# EAGLE board I2C Module v8 wo PS (EAGLE 6.1)
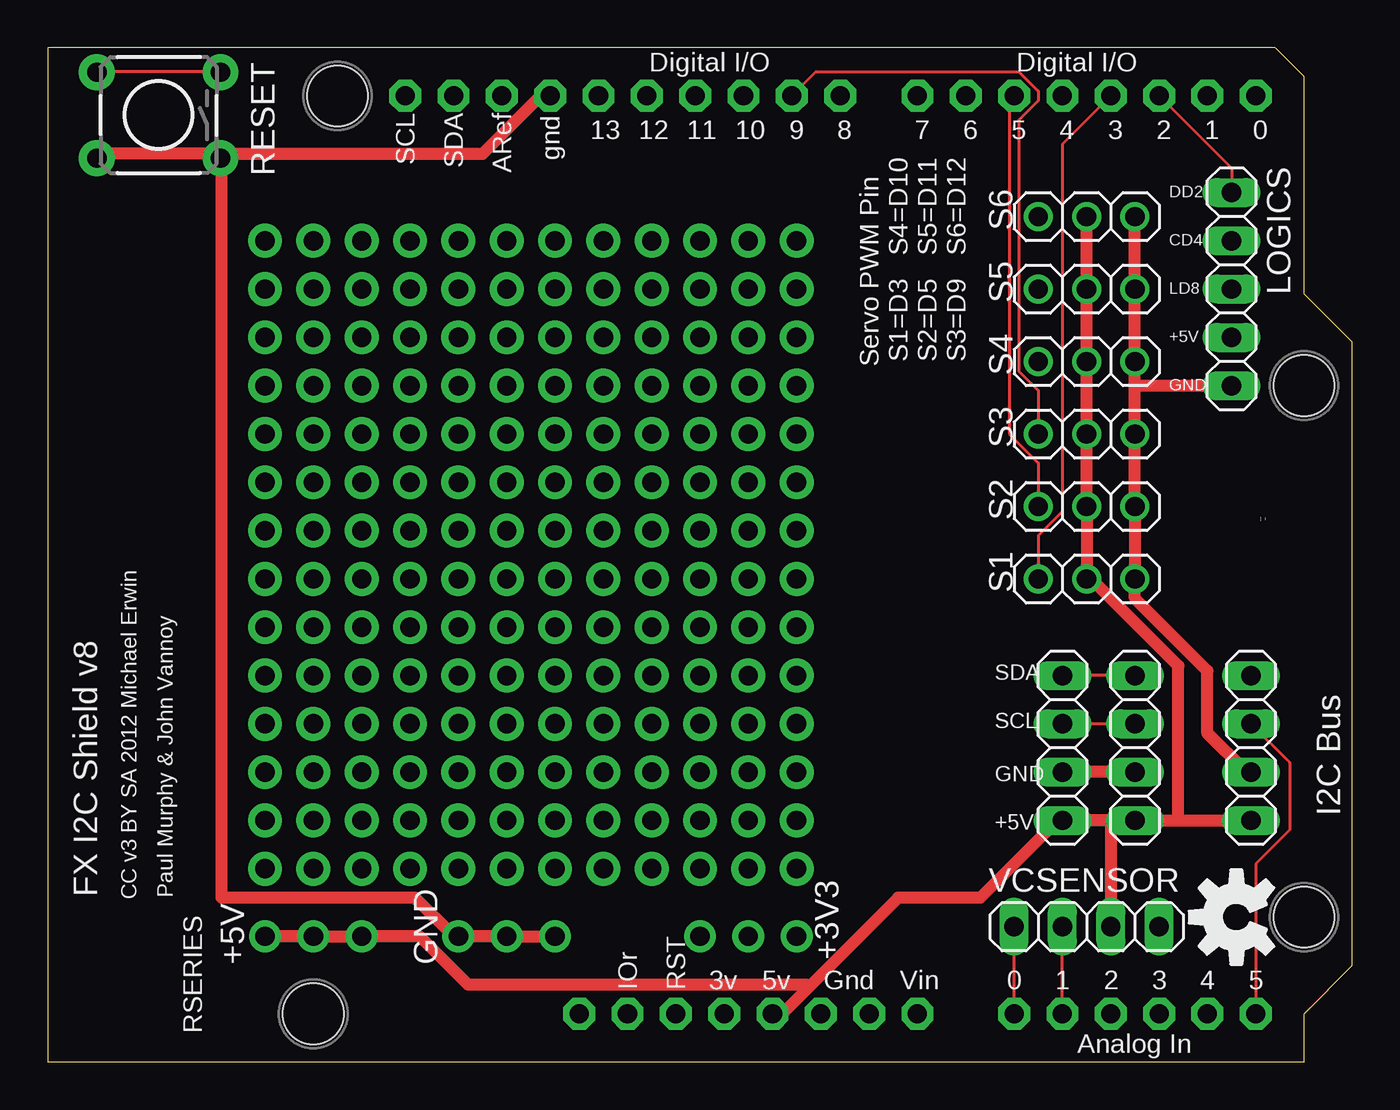
[diagram p0: board, top side]
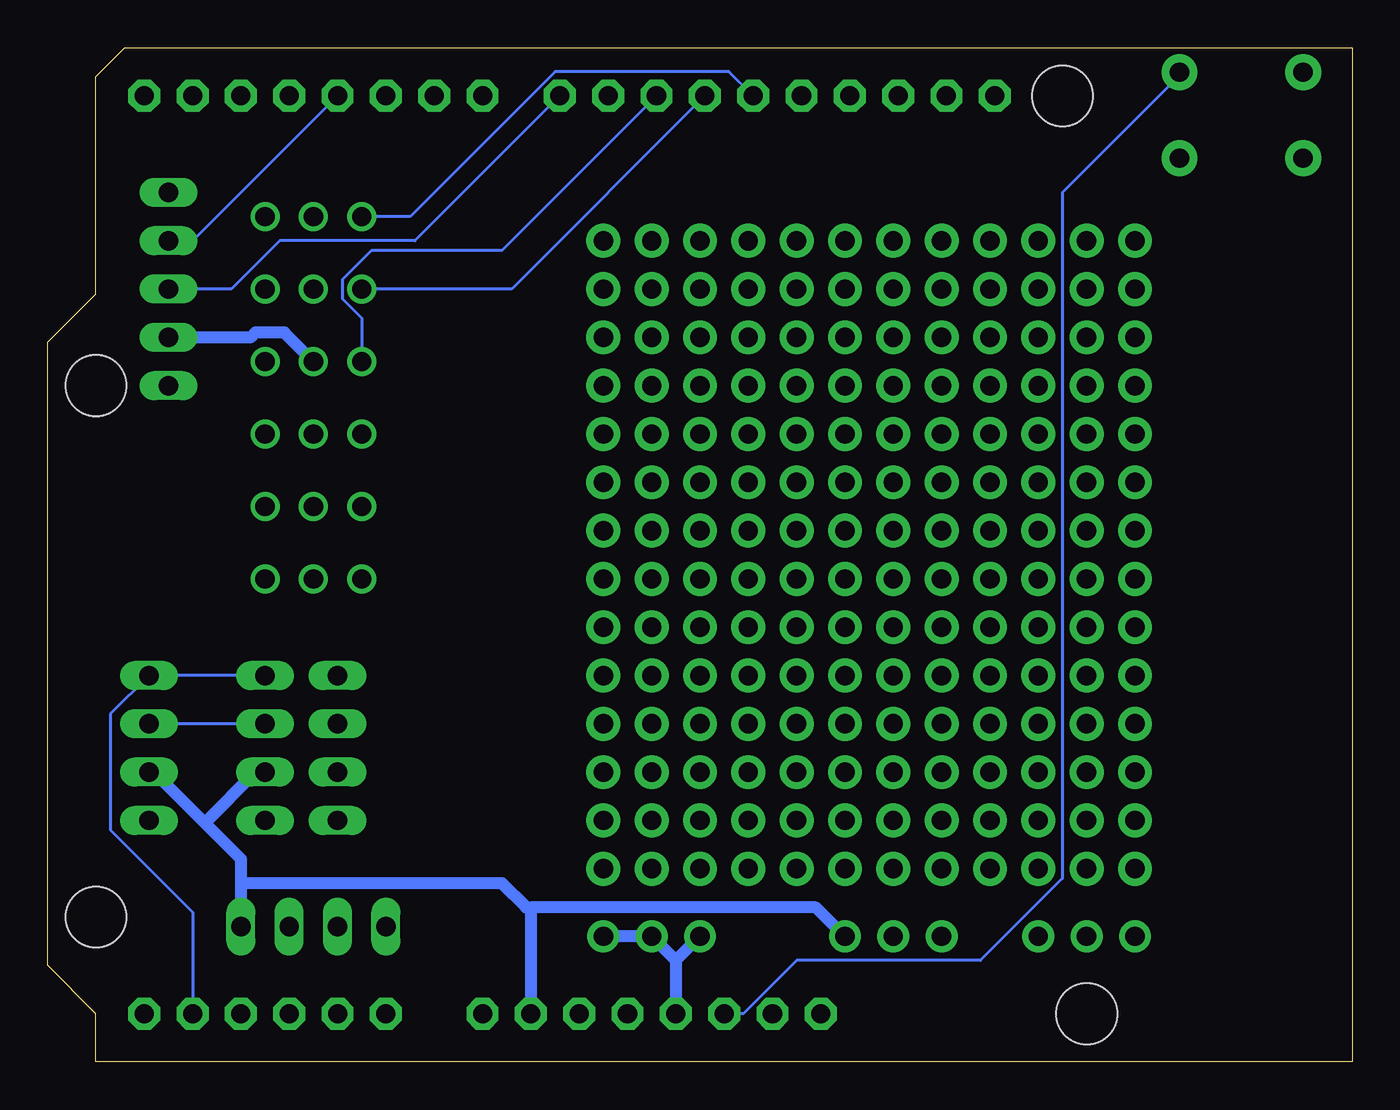
[diagram p1: board, bottom side, seen from below]

Size 68.58 x 53.34 mm. Coordinates in mm from the lower left corner, seen from the top.
Copper layers (1*16): Top 0.0356mm / dielectric 1.5011mm / Bottom 0.0356mm
Design rules: minimum track width 6mil, minimum drill 13mil, track to track 6mil, track to pad 6mil, pad to pad 6mil, via to via 6mil, smd to smd 6mil, copper to edge 15mil, drill to drill 6mil, minimum pad ring 7mil, minimum via ring 7mil, stop-mask expansion 4mil, vias tented up to drill 0mil, thermal gap 10mil
Net classes: 1 POWER: width 0.635 mm, clearance 0.254 mm
Holes 3.2 mm at 15.24,50.8 66.04,35.56 66.04,7.62 13.97,2.54

## Footprints (pad centres in the part's own frame; a part is rotated, then mirrored left to right if it is on the bottom)
1X03-CLEANBIG = drill 1.016 pad 1.676: 1 -2.54,0; 2 0,0; 3 2.54,0
1X04 = drill 1.016 long: 1 -3.81,0; 2 -1.27,0; 3 1.27,0; 4 3.81,0
1X12-CB = drill 1.016 pad 1.778: 1 -13.97,0; 2 -11.43,0; 3 -8.89,0; 4 -6.35,0; 5 -3.81,0; 6 -1.27,0; 7 1.27,0; 8 3.81,0; 9 6.35,0; 10 8.89,0; 11 11.43,0; 12 13.97,0
1X05 = drill 1.016 long: 1 -5.08,0; 2 -2.54,0; 3 0,0; 4 2.54,0; 5 5.08,0
TACTILE-PTH = drill 1.016 pad 1.88: 1 -3.251,2.261; 2 3.251,2.261; 3 -3.251,-2.261; 4 3.251,-2.261
1X03 = drill 1.016: 1 -2.54,0; 2 0,0; 3 2.54,0
ARDUINOR3 = drill 1 pad 1.676 octagon: 3V 35.56,2.54; 5V 38.1,2.54; A0 50.8,2.54; A1 53.34,2.54; A2 55.88,2.54; A3 58.42,2.54; A4 60.96,2.54; A5 63.5,2.54; AREF 23.876,50.8; D0 63.5,50.8; D1 60.96,50.8; D2 58.42,50.8; D3 55.88,50.8; D4 53.34,50.8; D5 50.8,50.8; D6 48.26,50.8; D7 45.72,50.8; D8 41.656,50.8; D9 39.116,50.8; D10 36.576,50.8; D11 34.036,50.8; D12 31.496,50.8; D13 28.956,50.8; GND 26.416,50.8; GND1 43.18,2.54; GND2 40.64,2.54; IOREF 30.48,2.54; RESERVED 27.94,2.54; RESET 33.02,2.54; SCL 18.796,50.8; SDA 21.336,50.8; VIN 45.72,2.54

## Placement (x,y rotation side)
+3V3  [1X03-CLEANBIG]  36.83,6.6 0 top
+5V  [1X03-CLEANBIG]  13.97,6.6 0 top
GND  [1X03-CLEANBIG]  24.13,6.6 0 top
I2C3  [1X04]  63.25,16.51 270 top
JP1  [1X04]  53.34,16.51 270 top
JP2  [1X04]  57.15,16.51 270 top
JP3  [1X12-CB]  25.4,10.16 0 top
JP4  [1X12-CB]  25.4,12.7 0 top
JP5  [1X12-CB]  25.4,15.24 0 top
JP6  [1X12-CB]  25.4,17.78 0 top
JP7  [1X12-CB]  25.4,20.32 0 top
JP8  [1X12-CB]  25.4,22.86 0 top
JP9  [1X12-CB]  25.4,25.4 0 top
JP10  [1X12-CB]  25.4,27.94 0 top
JP11  [1X12-CB]  25.4,30.48 0 top
JP12  [1X12-CB]  25.4,33.02 0 top
JP13  [1X12-CB]  25.4,35.56 0 top
JP14  [1X12-CB]  25.4,38.1 0 top
JP15  [1X12-CB]  25.4,40.64 0 top
JP16  [1X12-CB]  25.4,43.18 0 top
LOGICS  [1X05]  62.23,40.64 270 top
RESET  [TACTILE-PTH]  5.84,49.78 180 top
S1  [1X03]  54.61,25.4 0 top
S2  [1X03]  54.61,29.21 0 top
S3  [1X03]  54.61,33.02 0 top
S4  [1X03]  54.61,36.83 0 top
S5  [1X03]  54.61,40.64 0 top
S6  [1X03]  54.61,44.45 0 top
U1  ARDUINOR3-DIMENSION  [ARDUINOR3]  0,0 0 top
U$1  OSHW-LOGOM  [OSHW-LOGO-M]  62.48,7.62 90 top
VCSENSOR  [1X04]  54.61,7.11 0 top

## Library data of the parts
+3V3 +5V GND JP3-JP16 S1-S6 U1 = adafruit
I2C3 JP1 JP2 LOGICS VCSENSOR = pinhead
RESET = SparkFun-Electromechanical
U$1 = SparkFun-Aesthetics

## Nets
+3V3 [POWER]: +3V3.1 +3V3.2 +3V3.3 U1.3V
+5V [POWER]: +5V.1 +5V.2 +5V.3 I2C3.4 JP1.4 JP2.4 LOGICS.4 S1.2 S2.2 S3.2 S4.2 S5.2 S6.2 U1.5V VCSENSOR.3
GND [POWER]: GND.1 GND.2 GND.3 I2C3.3 JP1.3 JP2.3 LOGICS.5 RESET.1 RESET.2 S1.3 S2.3 S3.3 S4.3 S5.3 S6.3 U1.GND U1.GND1 VCSENSOR.4
GND2: U1.GND2
N$1: U1.A0 VCSENSOR.1
N$2: LOGICS.3 U1.D8
N$3: U1.A1 VCSENSOR.2
N$4: S1.1 U1.D3
N$5: S2.1 U1.D5
N$6: S3.1 U1.D9
N$7: S4.1 U1.D10
N$8: S5.1 U1.D11
N$9: S6.1 U1.D12
N$10: LOGICS.2 U1.D4
N$11: LOGICS.1 U1.D2
N$12: RESET.3 RESET.4 U1.RESET
N$15: I2C3.2 JP1.2 JP2.2 U1.A5
N$16: I2C3.1 JP1.1 JP2.1 U1.A4
VIN: U1.VIN

## Tracks (layer width: path | path; a pad name or v marks a point on that pad's centre or on a via)
+3V3
  Bottom 0.635: 35.56,5.33 U1.3V | +3V3.1 35.56,5.33 | 35.56,5.33 +3V3.2 +3V3.3
+5V
  Top 0.635: +5V.1 +5V.2 +5V.3 19.56,6.6 22.1,4.06 39.88,4.06 40.01,3.94 | S6.2 S5.2 S4.2 S3.2 S2.2 S1.2 54.86,25.4 59.44,20.83 59.44,12.7 | JP2.4 JP1.4 53.09,12.7 49.02,8.64 44.7,8.64 40.01,3.94 | JP2.4 59.44,12.7 | 59.44,12.7 I2C3.4 | U1.5V 38.61,2.54 40.01,3.94 | VCSENSOR.3 55.88,12.45 JP2.4
  Bottom 0.635: LOGICS.4 57.91,38.1 57.66,38.35 56.13,38.35 S4.2
GND
  Top 0.635: 57.15,35.56 S3.3 S2.3 S1.3 57.15,24.38 60.96,20.57 60.96,17.27 62.99,15.24 I2C3.3 | 57.15,35.56 S4.3 S5.3 S6.3 | 57.15,35.56 LOGICS.5 | GND.3 GND.2 GND.1 21.34,6.6 19.3,8.64 9.14,8.64 9.14,47.24 RESET.1 | JP2.3 JP1.3 53.09,15.24 | U1.GND 25.91,50.8 22.86,47.75 9.14,47.75 RESET.1 | RESET.2 2.79,47.75 8.89,47.75 RESET.1
  Bottom 0.635: 43.18,8.13 U1.GND1 | 60.33,12.57 62.99,15.24 I2C3.3 | 60.33,12.57 57.66,15.24 JP2.3 | 58.42,9.4 58.42,10.67 60.33,12.57 | 58.42,9.4 VCSENSOR.4 | 43.18,8.13 28.19,8.13 GND.3 | 58.42,9.4 44.7,9.4 43.43,8.13 43.18,8.13
N$1
  Top 0.152: U1.A0 VCSENSOR.1
N$2
  Bottom 0.152: LOGICS.3 58.93,40.64 56.39,43.18 49.28,43.18 U1.D8
N$3
  Top 0.152: U1.A1 VCSENSOR.2
N$4
  Top 0.152: U1.D3 53.34,48.26 53.34,28.96 52.07,27.69 S1.1
N$5
  Top 0.152: S2.1 52.07,31.5 50.55,33.02 50.55,50.55 U1.D5
N$6
  Top 0.152: S3.1 52.07,35.31 51.05,36.32 51.05,49.53 52.07,50.55 52.07,51.05 51.05,52.07 40.39,52.07 U1.D9
N$7
  Bottom 0.152: S4.1 52.07,39.12 53.09,40.13 53.09,41.15 51.56,42.67 44.7,42.67 U1.D10
N$8
  Bottom 0.152: S5.1 44.2,40.64 U1.D11
N$9
  Bottom 0.152: S6.1 49.53,44.45 41.91,52.07 32.77,52.07 U1.D12
N$10
  Bottom 0.152: LOGICS.2 60.96,43.18 U1.D4
N$11
  Top 0.152: LOGICS.1 62.23,46.99 U1.D2
N$12
  Top 0.152: RESET.4 2.79,52.07 8.89,52.07 RESET.3
  Bottom 0.152: U1.RESET 32,2.54 29.21,5.33 19.56,5.33 15.24,9.65 15.24,45.72 9.14,51.82 RESET.3
N$15
  Top 0.152: JP2.2 JP1.2 | U1.A5 63.5,10.41 65.28,12.19 65.28,15.75 I2C3.2
  Bottom 0.152: JP2.2 I2C3.2
N$16
  Top 0.152: JP2.1 JP1.1
  Bottom 0.152: JP2.1 I2C3.1 65.28,18.29 65.28,12.19 60.96,7.87 U1.A4

## Text on the board
_tsilk: DD2 | CD4 | S4=D10 | S5=D11 | S6=D12 | LD8 | +5V | Servo PWM Pin | S1=D3 | S2=D5 | S3=D9 | GND | SDA | SCL | GND | I2C Bus | +5V | FX I2C Shield v8 | CC v3 BY SA 2012 Michael Erwin | Paul Murphy & John Vannoy | RSERIES
200bmp: SDA